# EAGLE board cny70  (EAGLE 6.5.0)
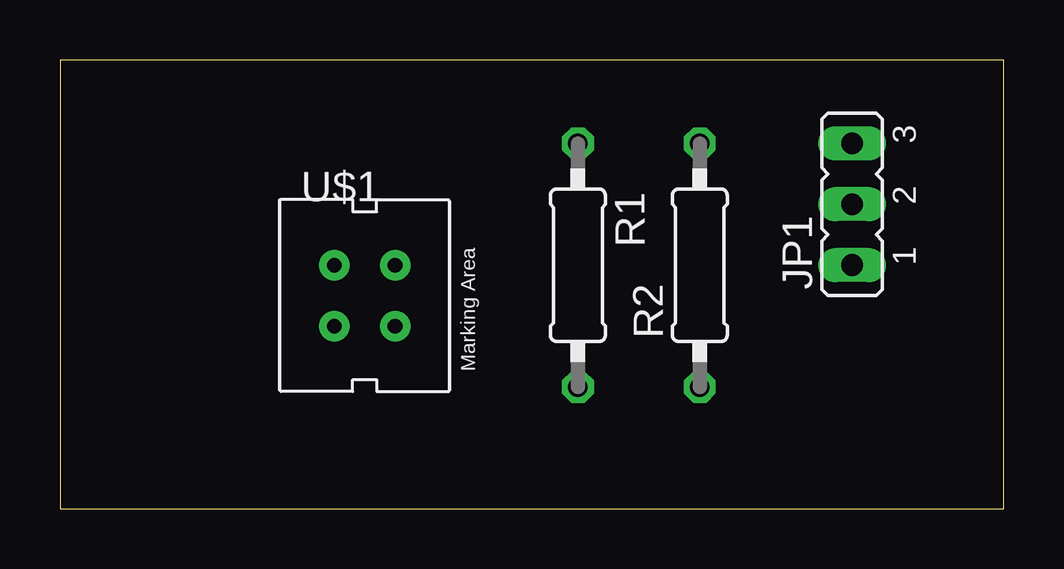
[diagram p0: board, top side]
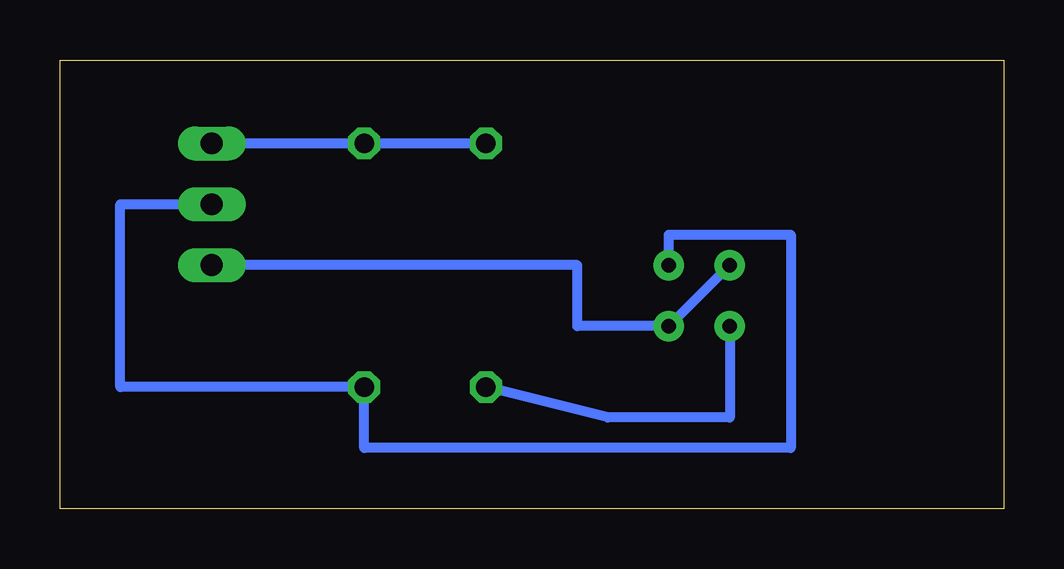
[diagram p1: board, bottom side, seen from below]

Size 39.35 x 18.72 mm. Coordinates in mm from the lower left corner, seen from the top.
Outline: 0,0 39.35,0 39.35,18.72 0,18.72 0,0
Copper layers (1*16): Top 0.035mm / dielectric 1.5mm / Bottom 0.035mm
Design rules "default": minimum track width 10mil, minimum drill 24mil, track to track 8mil, track to pad 8mil, pad to pad 8mil, via to via 8mil, smd to smd 8mil, copper to edge 40mil, drill to drill 8mil, minimum pad ring 10mil, minimum via ring 8mil, stop-mask expansion 4mil, vias tented up to drill 0mil, thermal gap 10mil

## Footprints (pad centres in the part's own frame; a part is rotated, then mirrored left to right if it is on the bottom)
JP2 = drill 0.914 long: 1 -2.54,0; 2 0,0; 3 2.54,0
0207/10 = drill 0.813 octagon: 1 -5.08,0; 2 5.08,0
4 = drill 0.61 pad 1.27: A -1.27,1.27; C 1.27,-1.27; E 1.27,1.27; K -1.27,-1.27

## Placement (x,y rotation side)
JP1  [JP2]  33.02,12.7 90 top
R1  330  [0207/10]  21.59,10.16 270 top
R2  47k  [0207/10]  26.67,10.16 90 top
U$1  CNY70  [4]  12.7,8.89 0 top

## Library data of the parts
JP1 = jumper
R1 R2 = resistor
U$1 = cny70

## Nets
N$1: JP1.1 U$1.A U$1.C
N$2: R1.2 U$1.K
N$3: JP1.3 R1.1 R2.2
N$4: JP1.2 R2.1 U$1.E

## Tracks (layer width: path | path; a pad name or v marks a point on that pad's centre or on a via)
N$1
  Bottom 0.406: U$1.A U$1.C 17.78,7.62 17.78,10.16 JP1.1
N$2
  Bottom 0.406: U$1.K 11.43,3.81 16.51,3.81 R1.2
N$3
  Bottom 0.406: R1.1 R2.2 JP1.3
N$4
  Bottom 0.406: U$1.E 13.97,11.43 8.89,11.43 8.89,2.54 26.67,2.54 R2.1 36.83,5.08 36.83,12.7 JP1.2